# Altium PCB PCB1.PcbDoc (part 2 of 4)
Units mm, origin at the board's own origin, x right, y up, seen from the top; angles counter-clockwise.
Board outline 55.25 x 50.25 mm, 10 copper layers (Top Layer, GND L2, Layer 3, GND L4, PWR L5, PWR L6, GND L7, Layer 8, GND L9, Bottom Layer), stack 1.615 mm thick; 238 components, 362 nets, 1809 pads, 129 vias.
Unrouted connection lines stored in the file: 1070.
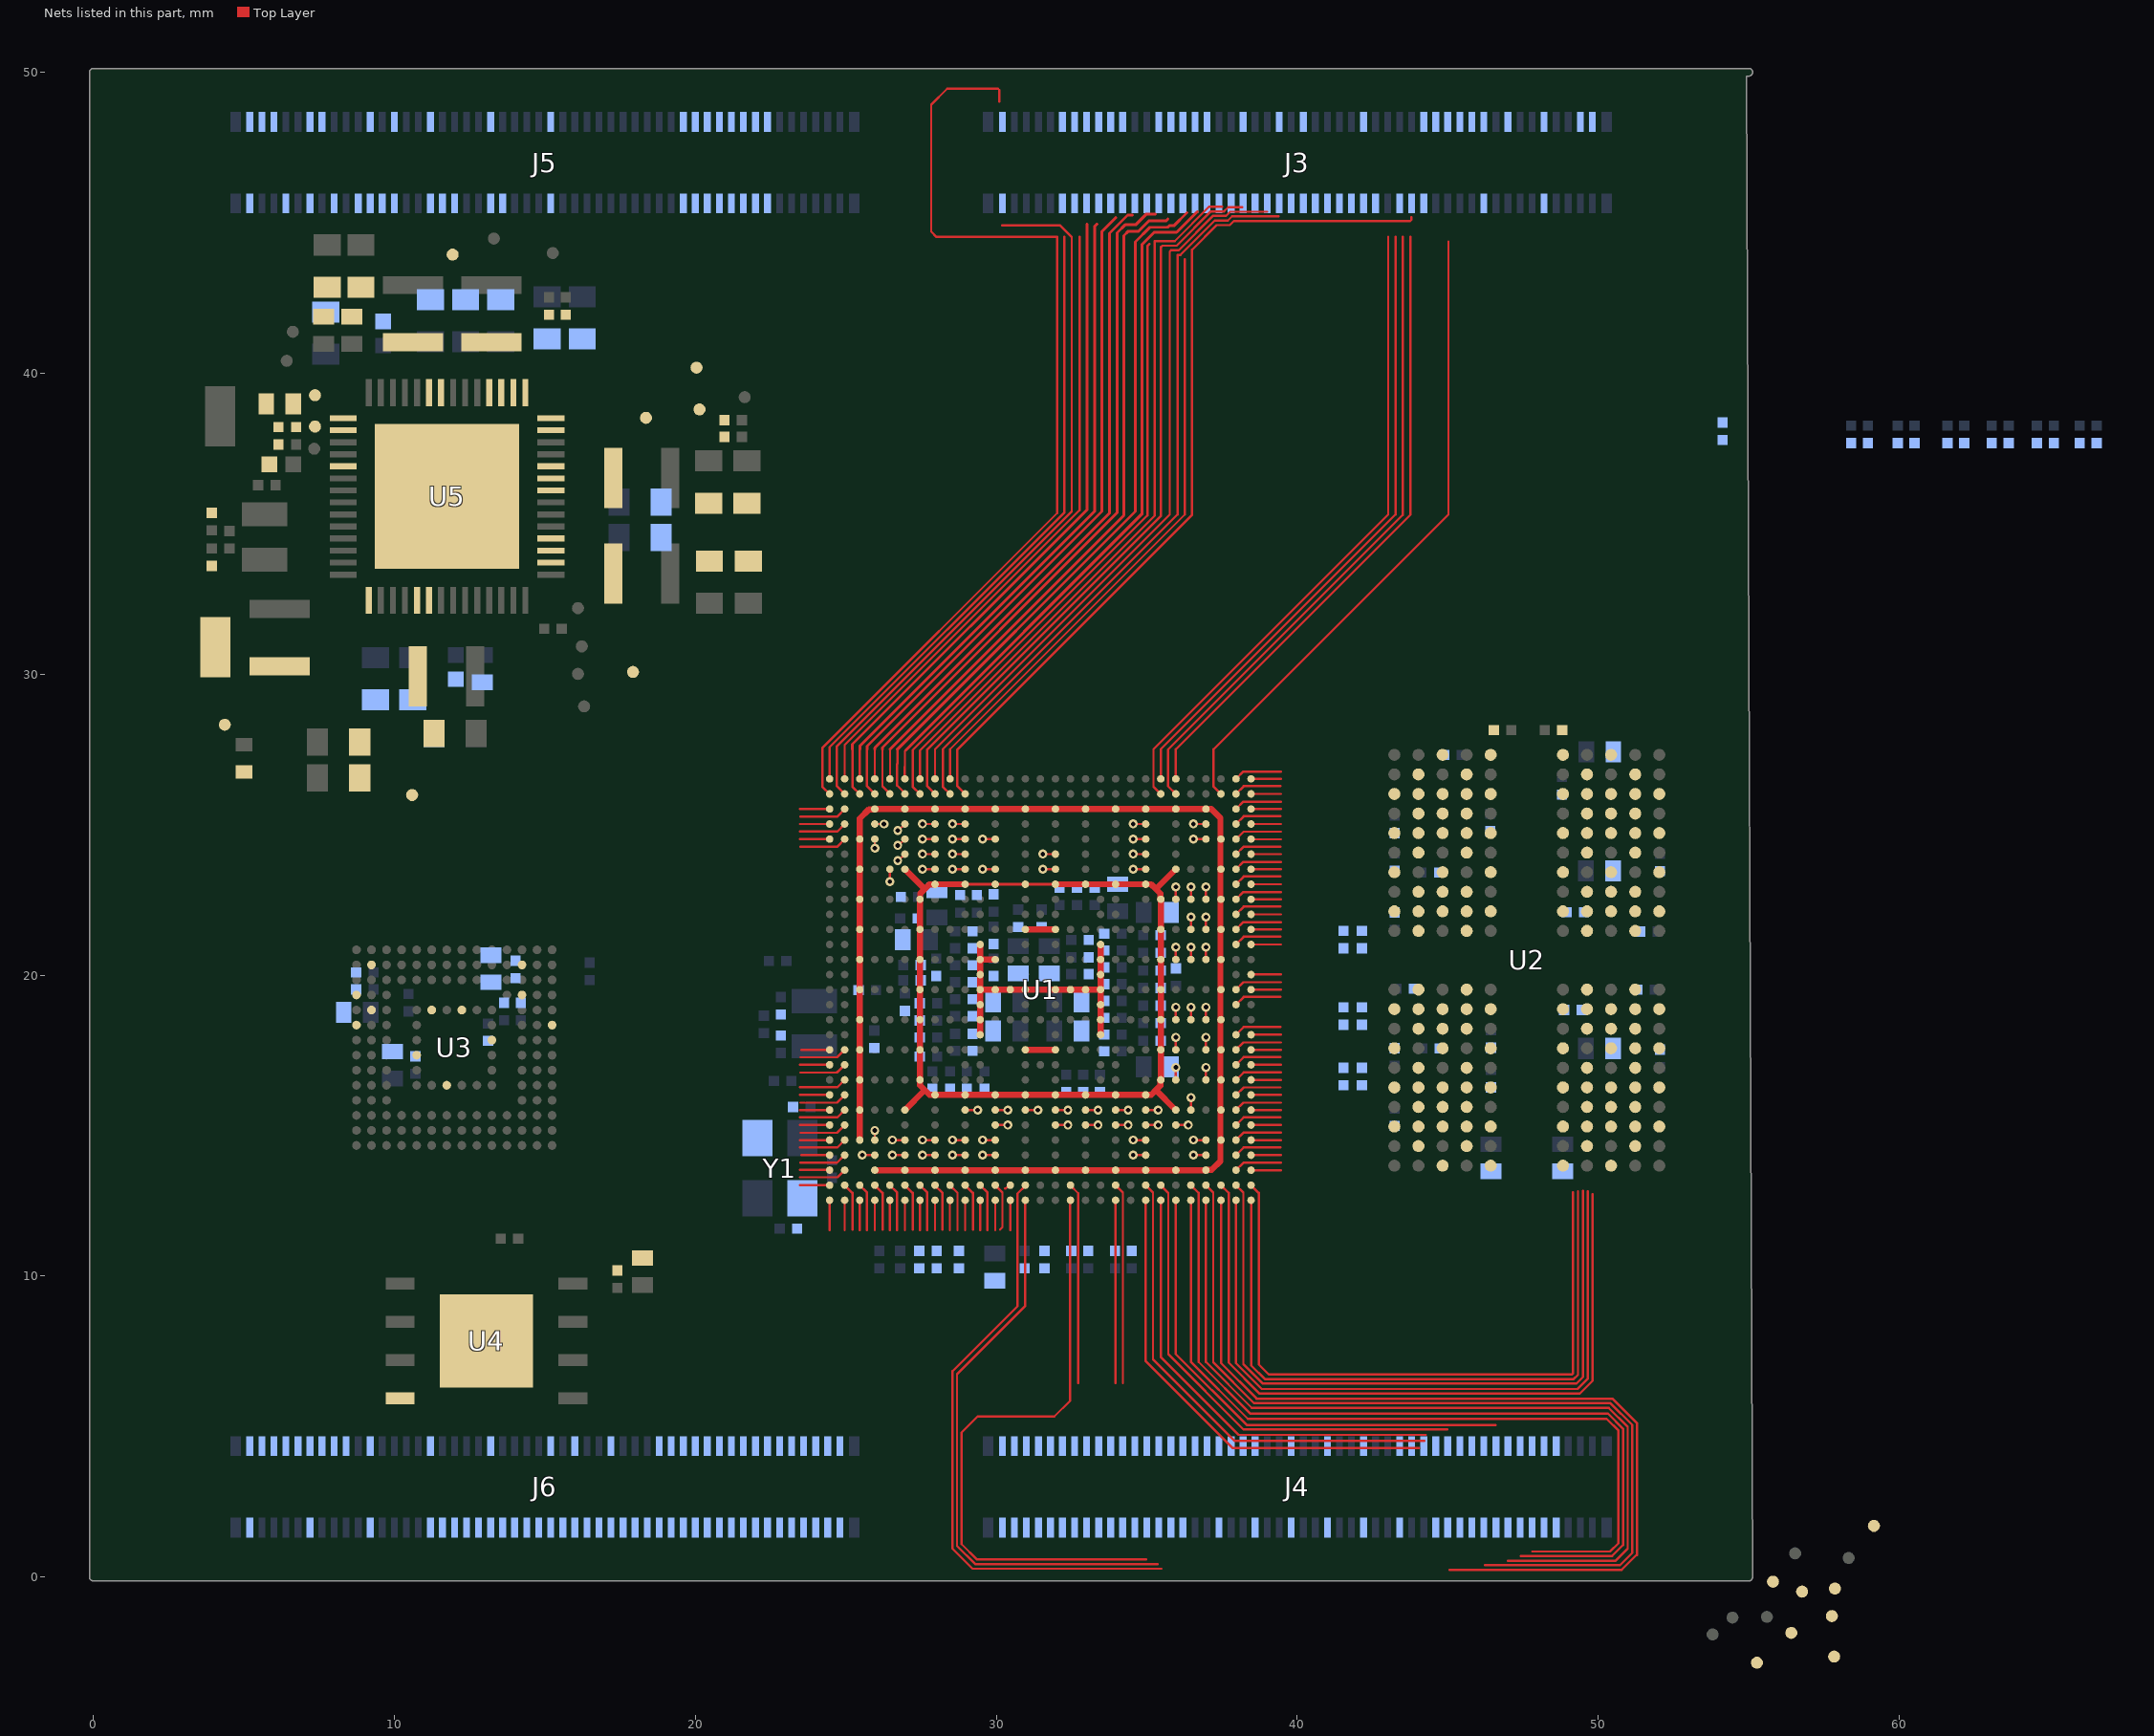
[diagram p2: the nets of this part, all layers, seen from the top]

## Part data
C1 C2 C3 C4 C130 C131: library part CMP-001-000420-11, "CAP_RF_MATCHING", Manufacturer=Murata, Manufacturer Part Number=GRM0335C1H120GA01, Operating temperature range="-55 ... +125C", Package=0201, Temperature characteristics=C0G, Tolerance="+/- 2%", Voltage=50V, ClassName=SMALL, Component Type=Capacitor, ComponentLink1Description=1_Datasheet, ComponentLink2Description="2_Product page", ComponentLink3Description=3_X-information, ComponentLink4Description=4_X-information, Creation date=20211123, HasBeenBuilt=TBD, Part Number=GRM0335C1H120GA01, Remark="RF matching, use part number", Sort order=202, Source=RLC_UN1Q.SchLib, System=RLC
C5 C6 C7 C11 C12 C13 C14 C17 C18 C19 C20 C21 C23 C24 C25 C27 C28 C29 C31 C32 C33 C34 C36 C37 C38 C39 C40 C41 C42 C44 C45 C46 C47 C48 C49 C50 C52 C53 C54 C56 C57 C58 C59 C63 C64 C65 C66 C69 C70 C71 C72 C73 C74 C76 C77 C78 C79 C80 C81 C82 C103 C106 C133 C134 C135 C136 C137 C138 C139 C140 C141 C142: library part CMP-001-000336-15, "CAP", Manufacturer="KYOCERA AVX", Manufacturer Part Number=KGM03CS61A105MH, Operating temperature range="-55C to +105C", Package=0201, Temperature characteristics=X6S, Tolerance=+/-20%, Voltage=10V, Alternative component=Allowed, ClassName=SMALL, Component Type=Capacitor, ComponentLink1Description=1_Datasheet, ComponentLink2Description="2_Product page", ComponentLink3Description=3_X-information, ComponentLink4Description=4_X-information, Creation date=20190101, HasBeenBuilt=False, Part Number=KGM03CS61A105MH, Sort order=302, Source=RLC_UN1Q.SchLib, System=RLC
C8 C10 C16 C22 C26 C30 C35 C43 C51 C55 C61 C62 C67 C68 C75 C91 C97 C99 C110 C132: library part CMP-001-000883-14, "CAP", Manufacturer="Cal-Chip Electronics", Manufacturer Part Number=GMC04X6S106M6R3NT, Package=0402, Temperature characteristics=X6S, Tolerance=+/-20%, Voltage=6.3V, Alternative component=Allowed, Component Type=Capacitor, ComponentLink1Description=1_Datasheet, ComponentLink2Description="2_Product page", ComponentLink3Description=3_X-information, ComponentLink4Description=4_X-information, Creation date=26042024, HasBeenBuilt=TBD, Part Number=GMC04X6S106M6R3NT, Sort order=304, System=RLC
C9 C15 C83 C84 C85 C89 C90 C92 C93 C94 C95 C96 C100 C143: library part CMP-001-000889-11, "CAP", Manufacturer=Murata, Manufacturer Part Number=GRM033C81A224KE01D, Package=0201, Temperature characteristics=X6S, Tolerance=+/-20%, Voltage=10V, Alternative component=Allowed, ClassName=SMALL, Component Type=Capacitor, ComponentLink1Description=1_Datasheet, ComponentLink2Description="2_Product page", ComponentLink3Description=3_X-information, ComponentLink4Description=4_X-information, Creation date=26042024, Dimensions WxLxH=0.35, HasBeenBuilt=TBD, Part Number=GRM033C81A224KE01D, Sort order=302, System=RLC
C60 C88 C112 C115 C129: library part CMP-001-000888-12, "CAP", Manufacturer=Murata, Manufacturer Part Number=GRT155C81A475ME13J, Package=0402, Temperature characteristics=X6S, Tolerance=+/-10%, Voltage=10V, Alternative component=Allowed, Component Type=Capacitor, ComponentLink1Description=1_Datasheet, ComponentLink2Description="2_Product page", ComponentLink3Description=3_X-information, ComponentLink4Description=4_X-information, Creation date=26042024, HasBeenBuilt=TBD, Part Number=GRT155C81A475ME13J, Sort order=304, System=RLC
C87: library part CMP-001-000281-14, "CAP", Manufacturer=Murata, Manufacturer Part Number=GRM033R71E222KA12J, Package=0201, Temperature characteristics=X7R, Tolerance=+/-10%, Voltage=25V, Alternative component=Allowed, ClassName=SMALL, Component Type=Capacitor, ComponentLink1Description=1_Datasheet, ComponentLink2Description="2_Product page", ComponentLink3Description=3_X-information, ComponentLink4Description=4_X-information, Creation date=20222504, HasBeenBuilt=TBD, Part Number=GRM033R71E222KA12J, Sort order=302, Source=RLC_UN1Q.SchLib, System=RLC
C98: library part CMP-001-000400-12, "CAP_RF_MATCHING", Manufacturer=Murata, Manufacturer Part Number=GJM0335C1E180JB01, Package=0201, Temperature characteristics=C0G, Tolerance=+/-2%, Voltage=25V, ClassName=SMALL, Component Type=Capacitor, ComponentLink1Description=1_Datasheet, ComponentLink2Description="2_Product page", ComponentLink3Description=3_X-information, ComponentLink4Description=4_X-information, Creation date=20200101, HasBeenBuilt=TBD, Part Number=GJM0335C1E180JB01, Remark="RF matching, use part number", Sort order=202, Source=RLC_UN1Q.SchLib, System=RLC
C101 C105 C109 C114 C118 C119 C122 C126: library part CMP-001-001253-9, "CAP", Manufacturer=Murata, Manufacturer Part Number=GRM188Z71A106KA73D, Package=0603, Temperature characteristics=X7R, Tolerance=+/-10%, Voltage=10V, Alternative component=Allowed, Component Type=Capacitor, ComponentLink1Description=1_Datasheet, ComponentLink2Description="2_Product page", ComponentLink3Description=3_X-information, ComponentLink4Description=4_X-information, Creation date=20240404, Part Number=GRM188Z71A106KA73D, Sort order=306, System=RLC
C102 C107 C111 C116 C120 C123: library part CMP-001-000259-10, "Not Assembled - CAP", Package=0603, Component Type=Capacitor, ComponentLink1Description=1_Datasheet, ComponentLink2Description="2_Product page", ComponentLink3Description=3_X-information, ComponentLink4Description=4_X-information, Creation date=20190101, HasBeenBuilt=TBD, Sort order=999, Source=RLC_UN1Q.SchLib, System=RLC
C104 C108 C113 C117 C121 C124: library part CMP-001-000890-13, "CAP", Manufacturer=Murata, Manufacturer Part Number=GRM188C80J226ME15D, Package=0603, Temperature characteristics=X6S, Tolerance=+/-20%, Voltage=6.3V, Alternative component=Allowed, Component Type=Capacitor, ComponentLink1Description=1_Datasheet, ComponentLink2Description="2_Product page", ComponentLink3Description=3_X-information, ComponentLink4Description=4_X-information, Creation date=26042024, HasBeenBuilt=TBD, Part Number=GRM188C80J226ME15D, Sort order=306, System=RLC
C125 C127 C128: library part CMP-001-001247-9, "CAP", Manufacturer=Murata, Manufacturer Part Number=GRM155Z71A105KE01J, Package=0402, Temperature characteristics=X7R, Tolerance=+/-10%, Voltage=10V, Alternative component=Allowed, Component Type=Capacitor, ComponentLink1Description=1_Datasheet, ComponentLink2Description="2_Product page", ComponentLink3Description=3_X-information, ComponentLink4Description=4_X-information, Creation date=20240404, Part Number=GRM155Z71A105KE01J, Sort order=304, System=RLC
J1 J2: library part CMP-001-000157-12, Part Number="TP 1x2mm", ClassName=SMALL, Component Type="Test Point", ComponentLink1Description=1_Datasheet, ComponentLink2Description="2_Product page", ComponentLink3Description=3_X-information, ComponentLink4Description=4_X-information, Creation date=20200101, Design Item ID=TP_1x2mm, HasBeenBuilt=-, Sort order=-, Source=Conn_UN1Q.SchLib, System="Test Point"
J3 J4 J5 J6: "100 Position Connector Plug, Outer Shroud Contacts Surface Mount Gold", Package=None, Check_prices=https://www.snapeda.com/parts/DF40C-100DP-0.4V(51)/Hirose/view-part/?ref=eda, MF="Hirose Electric", MP=DF40C-100DP-0.4V(51), SnapEDA_Link=https://www.snapeda.com/parts/DF40C-100DP-0.4V(51)/Hirose/view-part/?ref=snap
L1: library part CMP-001-000738-12, "FERRITE", Current=3.1A, Manufacturer=Murata, Manufacturer Part Number=BLM15KD300SN1D, Operating temperature range="-55 ... +125C", Package=0402, Part Number=BLM15KD300SN1, Component Type=Ferrite, ComponentLink1Description=1_Datasheet, ComponentLink1URL=https://www.murata.com/en-us/products/productdetail.aspx?cate=luNoiseSupprFilteChipFerriBead&partno=BLM15KD300SN1%23, ComponentLink2Description="2_Product page", ComponentLink3Description=3_X-information, ComponentLink4Description=4_X-information, Creation date=20200304, Dimensions WxLxH=0.55mm, ECCN=EAR99, HasBeenBuilt=Saluki2, RoHS=RoHS3, Sort order=364, Source=Discrete_UN1Q.SchLib, System=Discrete
L2 L3 L4 L5 L6 L7: library part CMP-001-000947-11, "IND, Low DCR shielded", Manufacturer=TDK, Manufacturer Part Number=VLS252012HBX-R47M-1, Operating temperature range="-40 ... +105 °C", Package=2520, ClassName=BIG, Component Type=Inductor, ComponentLink1Description=1_Datasheet, ComponentLink1URL=https://product.tdk.com/en/system/files?file=dam/doc/product/inductor/inductor/smd/catalog/inductor_commercial_power_vls252012hbx-1_en.pdf, ComponentLink2Description="2_Product page", ComponentLink3Description=3_X-information, ComponentLink4Description=4_X-information, Creation date=09022024, Dimensions WxLxH="2.5 x 2.0 x 1.2mm", Part Number=VLS252012HBX-R47M-1, Sort order=348, Source=UUDET_KOMPONENTIT.SchLib, System=RLC
PTP1 PTP2 PTP3 PTP4 PTP5 PTP6 PTP7 PTP8 PTP9 PTP10 PTP11 PTP14 PTP15 PTP16 PTP17 PTP18 PTP19 PTP20 PTP21 PTP22 PTP23 PTP24 PTP25 PTP26 PTP27 PTP28 PTP29 PTP30 PTP31 PTP32 PTP33 PTP34: library part CMP-001-001296-3, "Production Testpoint 0.4mm. Flying probe. Use 1mm pitch.", Part Number="PTP 0.4mm", ClassName=SMALL, Component Type="Test Point", ComponentLink1Description=1_Datasheet, ComponentLink2Description="2_Product page", ComponentLink3Description=3_X-information, ComponentLink4Description=4_X-information, Creation date=20240909, Design Item ID=PTP_0.4mm, HasBeenBuilt=-, Sort order=-, System="Test Point"
QZ1 QZ2: library part CMP-001-000697-8, "SMT Quartz Crystal", Manufacturer="Micro Crystal", Manufacturer Part Number=CM8V-T1A-32.768KHZ-9PF-20PPM-TA-QC, Operating temperature range="-40 .... +85 °C", Package=2-SMD, ClassName=BIG, Component Type="Crystal & Oscillator", ComponentLink1Description=1_Datasheet, ComponentLink1URL=https://www.microcrystal.com/fileadmin/Media/Products/32kHz/Datasheet/CM8V-T1A.pdf, ComponentLink2Description="2_Product page", ComponentLink2URL=https://www.microcrystal.com/en/products/khz-quartz-crystals/cm8v-t1a/, ComponentLink3Description=3_X-information, ComponentLink4Description=4_X-information, Creation date=20210913, Dimensions WxLxH=1.2x2.0x0.6mm, HasBeenBuilt=SleeveIO_01, Part Number=CM8V-T1A-32.768KHZ-9PF-20PPM-TA-QC, Sort order=455, Source=Discrete_UN1Q.SchLib, System=Discrete
R1 R5 R8 R9 R10 R11 R16 R17 R22 R23 R24 R26 R28 R32: library part CMP-001-000434-10, "Not Assembled - RES", Package=0201, ClassName=SMALL, Component Type=Resistor, ComponentLink1Description=1_Datasheet, ComponentLink2Description="2_Product page", ComponentLink3Description=3_X-information, ComponentLink4Description=4_X-information, Creation date=20190101, HasBeenBuilt=TBD, Sort order=999, Source=RLC_UN1Q.SchLib, System=RLC
R2 R3 R30 R31: library part CMP-001-000526-11, "RES", Manufacturer=YAGEO, Package=0201, Part Number=RC0201FR-07100KL, Power Rating=1/20W, Tolerance=1%, Alternative component=Allowed, ClassName=SMALL, Component Type=Resistor, ComponentLink1Description=1_Datasheet, ComponentLink2Description="2_Product page", ComponentLink3Description=3_X-information, ComponentLink4Description=4_X-information, Creation date=20190101, HasBeenBuilt=TBD, Sort order=322, Source=RLC_UN1Q.SchLib, System=RLC
R4 R12: library part CMP-001-000446-13, "RES", Manufacturer=YAGEO, Package=0201, Part Number=RC0201FR-0710KL, Power Rating=1/20W, Tolerance=1%, Alternative component=Allowed, ClassName=SMALL, Component Type=Resistor, ComponentLink1Description=1_Datasheet, ComponentLink2Description="2_Product page", ComponentLink3Description=3_X-information, ComponentLink4Description=4_X-information, Creation date=20190101, HasBeenBuilt=TBD, Sort order=322, Source=RLC_UN1Q.SchLib, System=RLC
R6: library part CMP-001-001254-9, "RES", Manufacturer="MULTICOMP PRO", Package=0201, Part Number=MCRE000254, Power Rating=1/20W, Tolerance=1%, Alternative component=Allowed, ClassName=SMALL, Component Type=Resistor, ComponentLink1Description=1_Datasheet, ComponentLink2Description="2_Product page", ComponentLink3Description=3_X-information, ComponentLink4Description=4_X-information, Creation date=20240404, Sort order=322, System=RLC
R7: library part CMP-001-000576-12, "RES", Manufacturer="Panasonic Electronic Components", Package=0201, Part Number=ERJ-1GNF5103C, Power Rating=1/20W, Tolerance=1%, Alternative component=Allowed, ClassName=SMALL, Component Type=Resistor, ComponentLink1Description=1_Datasheet, ComponentLink2Description="2_Product page", ComponentLink3Description=3_X-information, ComponentLink4Description=4_X-information, Creation date=20211123, HasBeenBuilt=TBD, Sort order=322, Source=RLC_UN1Q.SchLib, System=RLC
R13 R14 R15: library part CMP-001-000554-13, "RES", Manufacturer="Panasonic Electronic Components", Package=0201, Part Number=ERJ-1GEJ241C, Power Rating=1/20W, Tolerance=1%, Alternative component=Allowed, ClassName=SMALL, Component Type=Resistor, ComponentLink1Description=1_Datasheet, ComponentLink2Description="2_Product page", ComponentLink3Description=3_X-information, ComponentLink4Description=4_X-information, Creation date=20190101, HasBeenBuilt=TBD, Sort order=322, Source=RLC_UN1Q.SchLib, System=RLC
R18: library part CMP-001-000549-13, "RES", Manufacturer="Vishay Dale", Package=0201, Part Number=CRCW0201200RFNED, Power Rating=1/20W, Tolerance=1%, Alternative component=Allowed, ClassName=SMALL, ComponentLink1Description=1_Datasheet, ComponentLink2Description="2_Product page", ComponentLink3Description=3_X-information, ComponentLink4Description=4_X-information, Creation date=20190101, HasBeenBuilt=TBD, Sort order=322, Source=RLC_UN1Q.SchLib, System=RLC
R19: library part CMP-001-001255-9, "RES", Manufacturer=Panasonic, Manufacturer Part Number=ERJ1GNF8201C, Package=0201, Power Rating=1/20W, Tolerance=1%, Alternative component=Allowed, ClassName=SMALL, Component Type=Resistor, ComponentLink1Description=1_Datasheet, ComponentLink2Description="2_Product page", ComponentLink3Description=3_X-information, ComponentLink4Description=4_X-information, Creation date=20240404, Part Number=ERJ1GNF8201C, Sort order=322, System=RLC
R21: library part CMP-001-001255-9, "RES", Manufacturer="Panasonic Electronic Components", Package=0201, Part Number=ERJ1GNF8201C, Power Rating=1/20W, Tolerance=1%, Alternative component=Allowed, ClassName=SMALL, Component Type=Resistor, ComponentLink1Description=1_Datasheet, ComponentLink2Description="2_Product page", ComponentLink3Description=3_X-information, ComponentLink4Description=4_X-information, Creation date=20240404, Sort order=322, System=RLC
R25: library part RES_0201_10k, "RES", Package=0201, Power Rating=1/20W, Tolerance=+/-1%, ClassName=SMALL, ComponentLink1Description=1_Datasheet, ComponentLink2Description=2_Product_page, ComponentLink3Description=3_X-information, ComponentLink4Description=4_X-information, Creation date=20190101, Desc2=resistance_10K_1%_1/20W, HasBeenBuilt=TBD, HasBeenChecked=None, Sort order=322, System=RLC
R27 R29: library part CMP-001-000429-13, "RES", Manufacturer=YAGEO, Package=0201, Part Number=RC0201JR-070RL, Power Rating=1/20W, Tolerance=5%, Alternative component=Allowed, ClassName=SMALL, Component Type=Resistor, ComponentLink1Description=1_Datasheet, ComponentLink2Description="2_Product page", ComponentLink3Description=3_X-information, ComponentLink4Description=4_X-information, Creation date=20190101, HasBeenBuilt=TBD, Sort order=322, Source=RLC_UN1Q.SchLib, System=RLC
R33 R34 R35 R36 R37 R38 R39 R40 R41 R42 R43 R44: library part CMP-001-000475-13, "RES", Manufacturer="Yageo Group", Manufacturer Part Number=RC0201FR-074K7L, Package=0201, Power Rating=1/20W, Tolerance=1%, Alternative component=Allowed, ClassName=SMALL, Component Type=Resistor, ComponentLink1Description=1_Datasheet, ComponentLink2Description="2_Product page", ComponentLink3Description=3_X-information, ComponentLink4Description=4_X-information, Creation date=20190101, HasBeenBuilt=TBD, Part Number=RC0201FR-074K7L, Sort order=322, Source=RLC_UN1Q.SchLib, System=RLC
U1: library part CMP-001-000983-8, "CPU QUAD CORTEX A53+M4 1.6GHZ BGA548 Industrial", Manufacturer="NXP Semiconductors", Operating temperature range="-40... +105 °C", Package=FCBGA548, ClassName=BIG, Component Type=Processor, ComponentLink1Description=1_Datasheet, ComponentLink1URL=https://www.nxp.com/part/MIMX8ML8CVNKZAB#/, ComponentLink2Description="2_Product page", ComponentLink3Description=3_X-information, ComponentLink4Description=4_X-information, Creation date=20240524, Design Item ID=MIMX8ML8CVNKZAB, Dimensions WxLxH="15 x 15 x 1.33mm", Manufacturer Part Number=MIMX8ML8CVNKZAB, Part Number=MIMX8ML8CVNKZAB, Sort order=501, Source=UUDET_KOMPONENTIT.SchLib, System=IC
U2: library part CMP-001-001446-1, "MEM LPDDR4 SDRAM 2133MHz 2Gx32Gb 1.1V", Manufacturer=Micron, Operating temperature range="-40 .... +105 °C", Package=TFBGA-200, ClassName=BIG, Component Type=Memory, ComponentLink1Description=1_Datasheet, ComponentLink1URL=https://www.micron.com/products/memory/dram-components/lpddr4/part-catalog/part-detail/mt53e2g32d4de-046-aat-c#login-modal, ComponentLink2Description="2_Product page", ComponentLink2URL=https://www.micron.com/products/memory/dram-components/lpddr4/part-catalog/part-detail/mt53e2g32d4de-046-aat-c, ComponentLink3Description=3_X-information, ComponentLink4Description=4_X-information, Creation date=20250619, Design Item ID="MT53E2G32D4DE-046 AAT:C", Dimensions WxLxH=10x14.5x1.2mm, ECCN=EAR99, Manufacturer Part Number="MT53E2G32D4DE-046 AAT:C", Part Number="MT53E2G32D4DE-046 AAT:C", Sort order=511, System=IC
U3: library part CMP-001-001175-2, "MEM NAND FLASH 512GB eMMC 5.1 HS400 2.7-3.6V, 1.8V VCCQ, TFBGA153 Ferri-eMMC Automotive", Manufacturer="Silicon Motion", Manufacturer Part Number=SM662PBFBFSS, Operating temperature range="-40 .... +105 °C", Package=TFBGA-153, Component Type=Memory, ComponentLink1Description=1_Datasheet, ComponentLink2Description="2_Product page", ComponentLink2URL=https://www.siliconmotion.com/products/Ferri-eMMC/detail, ComponentLink3Description="3_Product brief", ComponentLink3URL=https://www.siliconmotion.com/download/DWo5/a/Ferri-eMMC_PB_EN.pdf, ComponentLink4Description=4_X-information, Creation date=20250508, Dimensions WxLxH="11.5 x 13 x 1.2 mm", Part Number="SM662PBF BFS", Sort order=511, System=IC
U4: "Description", Manufacturer_Name=Micron, Copyright="Copyright (C) 2025 Ultra Librarian. All rights reserved.", Manufacturer_Part_Number=MT25QU256ABA1EW7-0SIT, RefDes=RefDes, Type=Type
U5: library part CMP-031-000204-7, "POWER MANAGEMENT 2.7-5.5V HVQFN56", Manufacturer="NXP SEMICONDUCTORS", Manufacturer Part Number=PCA9450CHN, Operating temperature range="-40 .... +105 °C", Package=QFN56, ClassName=BIG, Component Type="Power Supply", ComponentLink1Description=1_Datasheet, ComponentLink1URL=https://www.nxp.com/products/power-management/pmics-and-sbcs/pmics/power-management-ic-pmic-for-i-mx-8m-mini-nano-plus:PCA9450, ComponentLink2Description="2_Product page", ComponentLink3Description=3_X-information, ComponentLink4Description=4_X-information, Creation date=20240207, Design Item ID=PCA9450CHN, Dimensions WxLxH=7.0x7.0x1.0, Part Number=PCA9450CHN, Sort order=451, Source=UUDET_KOMPONENTIT.SchLib, System=IC
Y1: library part CMP-001-001243-5, "Crystal 24 MHz ±10ppm 9pF 40Ohms 4-SMD", Manufacturer=Epson, Manufacturer Part Number="TSX-3225 24.0000MF20G-AC3", Operating temperature range="-40 ... +105C", Tolerance=+/-10ppm, Component Type="Crystal & Oscillator", ComponentLink1Description=1_Datasheet, ComponentLink1URL=https://support.epson.biz/td/api/doc_check.php?dl=brief_TSX-3225&lang=en, ComponentLink2Description="2_Product page", ComponentLink3Description=3_X-information, ComponentLink4Description=4_X-information, Creation date=20240430, Dimensions WxLxH="3.2 x 2.5 x 0.6mm", Part Number="TSX-3225 24.0000MF20G-AC3", Sort order=455, System=Discrete

## Via types
v1: diameter 0.3, hole 0.15, Top Layer to Bottom Layer, tented both sides, 129 vias

## Nets (pads, with @x,y where several pads share a name; then routed paths per layer and width w, separated by ;. In a path a pad name is that pad's centre, name@x,y a point inside that pad or via, vN(x,y) a via of type N, cw(c..) or ccw(c..) an arc to the next point about the centre after c; other vN are vias at no path point)
5V0_SMPS: L1.1
\JTAG_RST: J4.66 PTP1.1 R4.1 U1.G20 | length 0.4
  Top Layer w0.076: U1.G20@28.964,15.52 v1@29.377,15.52
  other v1: 29.38,15.518
\mPCIe_RST: J5.81 U1.AF20 | length 0.4
  Top Layer w0.076: v1@28.551,25.02 U1.AF20@28.964,25.02
  other v1: 28.548,25.023
\USB_HUB_RST: J5.96 U1.AE20 | length 0.4
  Top Layer w0.076: v1@28.551,24.52 U1.AE20@28.964,24.52
  other v1: 28.548,24.523
BOOT_MODE0: J4.9 U1.G10 | length 0.4
  Top Layer w0.076: U1.G10@33.964,15.52 v1@34.377,15.52
  other v1: 34.38,15.518
BOOT_MODE1: J4.20 U1.F8 | length 0.4
  Top Layer w0.076: U1.F8@34.964,15.02 v1@35.377,15.02
  other v1: 35.38,15.018
BOOT_MODE2: J4.12 U1.G8 | length 0.4
  Top Layer w0.076: U1.G8@34.964,15.52 v1@35.377,15.52
  other v1: 35.38,15.518
BOOT_MODE3: J4.16 U1.G12 | length 0.4
  Top Layer w0.076: U1.G12@32.964,15.52 v1@33.377,15.52
  other v1: 33.38,15.518
CLKIN1: J6.86 U1.K28 | length 1.9
  Top Layer w0.076: 23.489,16.763 24.707,16.763 U1.K28@24.964,17.02 ; 24.721,16.785 U1.K28@24.964,17.028
CLKIN2: J6.94 U1.L28 | length 1.6
  Top Layer w0.076: 23.489,17.271 24.707,17.271 U1.L28@24.964,17.528
CLKOUT1: J6.90 U1.K29 | length 1
  Top Layer w0.076: 23.478,17.028 U1.K29@24.464,17.028
CLKOUT2: J6.98 U1.L29 | length 0.9
  Top Layer w0.076: 23.528,17.522 23.53,17.52 U1.L29@24.464,17.52
CSI1_CKN: J4.84 U1.E22 | length 0.4
  Top Layer w0.076: v1@27.551,14.52 U1.E22@27.964,14.52
  other v1: 27.548,14.523
CSI1_CKP: J4.86 U1.D22 | length 0.4
  Top Layer w0.076: v1@27.551,14.02 U1.D22@27.964,14.02
  other v1: 27.548,14.023
CSI1_DN0: J4.72 U1.E18 | length 0.4
  Top Layer w0.076: v1@29.551,14.52 U1.E18@29.964,14.52
  other v1: 29.548,14.523
CSI1_DN1: J4.78 U1.E20 | length 0.4
  Top Layer w0.076: v1@28.551,14.52 U1.E20@28.964,14.52
  other v1: 28.548,14.523
CSI1_DN2: J4.90 U1.E24 | length 0.4
  Top Layer w0.076: v1@26.551,14.52 U1.E24@26.964,14.52
  other v1: 26.548,14.523
CSI1_DN3: J4.96 U1.E26 | length 0.3
  Top Layer w0.076: U1.E26@25.964,14.52 v1(25.964,14.839)
CSI1_DP0: J4.74 U1.D18 | length 0.4
  Top Layer w0.076: v1@29.551,14.02 U1.D18@29.964,14.02
  other v1: 29.548,14.023
CSI1_DP1: J4.80 U1.D20 | length 0.4
  Top Layer w0.076: v1@28.551,14.02 U1.D20@28.964,14.02
  other v1: 28.548,14.023
CSI1_DP2: J4.92 U1.D24 | length 0.4
  Top Layer w0.076: v1@26.551,14.02 U1.D24@26.964,14.02
  other v1: 26.548,14.023
CSI1_DP3: J4.98 U1.D26 | length 0.4
  Top Layer w0.076: v1@25.551,14.02 U1.D26@25.964,14.02
  other v1: 25.548,14.023
CSI2_CKN: J6.16 U1.B23 | length 1.6
  Top Layer w0.076: U1.B23@27.464,13.02 27.707,12.777 27.707,11.534
CSI2_CKP: J6.18 U1.A23 | length 1
  Top Layer w0.076: 27.464,11.534 U1.A23@27.464,12.52
CSI2_DN0: J6.28 U1.B25 | length 1.6
  Top Layer w0.076: U1.B25@26.464,13.02 26.707,12.777 26.707,11.534
CSI2_DN1: J6.22 U1.B24 | length 1.6
  Top Layer w0.076: U1.B24@26.964,13.02 27.221,12.763 27.221,11.545
CSI2_DN2: J6.10 U1.B22 | length 1.6
  Top Layer w0.076: U1.B22@27.956,13.02 28.213,12.763 28.213,11.545
CSI2_DN3: J6.4 U1.B21 | length 1.6
  Top Layer w0.076: U1.B21@28.456,13.02 28.71,12.766 28.71,11.536
CSI2_DP0: J6.30 U1.A25 | length 1
  Top Layer w0.076: 26.464,11.534 U1.A25@26.464,12.52
CSI2_DP1: J6.24 U1.A24 | length 1
  Top Layer w0.076: 26.964,11.534 U1.A24@26.964,12.52
CSI2_DP2: J6.12 U1.A22 | length 1
  Top Layer w0.076: 27.964,11.533 U1.A22@27.964,12.52
CSI2_DP3: J6.6 U1.A21 | length 1
  Top Layer w0.076: 28.456,11.534 U1.A21@28.456,12.52
DRAM_CA0_A: U1.L6 U2.R2 | length 0.4
  Top Layer w0.076: U1.L6@35.964,17.52 v1@35.964,17.933
  other v1: 35.967,17.936
DRAM_CA0_B: U1.W4 U2.H2 | length 0.4
  Top Layer w0.076: U1.W4@36.964,21.52 v1@36.964,21.933
  other v1: 36.967,21.936
DRAM_CA1_A: U1.L4 U2.P2 | length 0.4
  Top Layer w0.076: U1.L4@36.964,17.52 v1@36.964,17.933
  other v1: 36.967,17.936
DRAM_CA1_B: U1.W5 U2.J2 | length 0.4
  Top Layer w0.076: U1.W5@36.464,21.52 v1@36.464,21.933
  other v1: 36.467,21.936
DRAM_CA2_A: U1.E4 U2.R9 | length 0.4
  Top Layer w0.076: v1@36.551,14.52 U1.E4@36.964,14.52
  other v1: 36.548,14.523
DRAM_CA2_B: U1.AE4 U2.H9 | length 0.4
  Top Layer w0.076: v1@36.551,24.52 U1.AE4@36.964,24.52
  other v1: 36.548,24.523
DRAM_CA3_A: U1.D4 U2.R10 | length 0.4
  Top Layer w0.076: v1@36.551,14.02 U1.D4@36.964,14.02
  other v1: 36.548,14.023
DRAM_CA3_B: U1.AF4 U2.H10 | length 0.4
  Top Layer w0.076: v1@36.551,25.02 U1.AF4@36.964,25.02
  other v1: 36.548,25.023
DRAM_CA4_A: U1.N4 U2.R11 | length 0.4
  Top Layer w0.076: U1.N4@36.964,18.52 v1@36.964,18.933
  other v1: 36.967,18.936
DRAM_CA4_B: U1.U5 U2.H11 | length 0.4
  Top Layer w0.076: U1.U5@36.464,20.52 v1@36.464,20.933
  other v1: 36.467,20.936
DRAM_CA5_A: U1.N5 U2.P11 | length 0.4
  Top Layer w0.076: U1.N5@36.464,18.52 v1@36.464,18.933
  other v1: 36.467,18.936
DRAM_CA5_B: U1.U6 U2.J11 | length 0.4
  Top Layer w0.076: U1.U6@35.964,20.52 v1@35.964,20.933
  other v1: 35.967,20.936
DRAM_CK_A_N: R16.1 U1.M2 U2.P9 | length 1.6
  Top Layer w0.076: U1.M2@37.964,18.02 38.221,18.278 39.439,18.278
DRAM_CK_A_P: R16.2 U1.M1 U2.P8 | length 1
  Top Layer w0.076: U1.M1@38.464,18.02 39.45,18.02
DRAM_CK_B_N: R17.1 U1.V1 U2.J9 | length 1
  Top Layer w0.076: U1.V1@38.464,21.02 39.45,21.02
DRAM_CK_B_P: R17.2 U1.V2 U2.J8 | length 1.6
  Top Layer w0.076: U1.V2@37.964,21.02 38.221,21.278 39.439,21.278
DRAM_CKE0_A: R10.2 U1.J6 U2.P4 | length 0.4
  Top Layer w0.076: U1.J6@35.964,16.52 v1@35.964,16.933
  other v1: 35.967,16.936
DRAM_CKE0_B: R8.2 U1.AA4 U2.J4 | length 0.4
  Top Layer w0.076: U1.AA4@36.964,22.52 v1@36.964,22.933
  other v1: 36.967,22.936
DRAM_CKE1_A: R11.2 U1.G5 U2.P5 | length 0.4
  Top Layer w0.076: U1.G5@36.464,15.52 v1@36.464,15.933
  other v1: 36.467,15.936
DRAM_CKE1_B: R9.2 U1.AA5 U2.J5 | length 0.4
  Top Layer w0.076: U1.AA5@36.464,22.52 v1@36.464,22.933
  other v1: 36.467,22.936
DRAM_DATA0_A: U1.B3 U2.AA11 | length 24.9
  Top Layer w0.076: U1.B3@37.464,13.02 37.721,12.763 37.721,7.124 38.749,6.096 49.381,6.096 49.807,6.521 49.807,12.723
DRAM_DATA0_B: U1.AC1 U2.B2 | length 1
  Top Layer w0.076: U1.AC1@38.464,23.52 39.45,23.52
DRAM_DATA1_A: U1.A2 U2.Y11 | length 23.8
  Top Layer w0.076: U1.A2@37.964,12.52 37.964,7.106 38.822,6.248 49.309,6.248 49.654,6.594 49.654,12.824
DRAM_DATA1_B: U1.AB1 U2.C2 | length 1
  Top Layer w0.076: U1.AB1@38.464,23.02 39.45,23.02
DRAM_DATA2_A: U1.E1 U2.V9 | length 1
  Top Layer w0.076: U1.E1@38.464,14.52 39.45,14.52
DRAM_DATA2_B: U1.W2 U2.F2 | length 1.6
  Top Layer w0.076: U1.W2@37.964,21.52 38.207,21.764 39.45,21.764
DRAM_DATA3_A: U1.F2 U2.U11 | length 1.6
  Top Layer w0.076: U1.F2@37.964,15.02 38.221,15.278 39.439,15.278
DRAM_DATA3_B: U1.Y2 U2.E2 | length 1.6
  Top Layer w0.076: U1.Y2@37.964,22.02 38.221,22.278 39.439,22.278
DRAM_DATA4_A: U1.E2 U2.U9 | length 1.6
  Top Layer w0.076: U1.E2@37.964,14.52 38.207,14.764 39.45,14.764
DRAM_DATA4_B: U1.Y1 U2.E4 | length 1
  Top Layer w0.076: U1.Y1@38.464,22.02 39.45,22.02
DRAM_DATA5_A: U1.C1 U2.V11 | length 1
  Top Layer w0.076: U1.C1@38.464,13.52 39.45,13.52
DRAM_DATA5_B: U1.W1 U2.F4 | length 1
  Top Layer w0.076: U1.W1@38.464,21.52 39.45,21.52
DRAM_DATA6_A: U1.C2 U2.Y9 | length 1.6
  Top Layer w0.076: U1.C2@37.964,13.52 38.207,13.764 39.45,13.764
DRAM_DATA6_B: U1.AC2 U2.C4 | length 1.6
  Top Layer w0.076: U1.AC2@37.964,23.52 38.207,23.764 39.45,23.764
DRAM_DATA7_A: U1.B1 U2.AA9 | length 22.7
  Top Layer w0.076: U1.B1@38.464,13.02 38.721,12.763 38.721,7.067 39.057,6.731 49.119,6.731 49.164,6.776 49.164,12.79
DRAM_DATA7_B: U1.AD1 U2.B4 | length 1
  Top Layer w0.076: U1.AD1@38.464,24.02 39.452,24.02
DRAM_DATA8_A: U1.G1 U2.AA2 | length 1
  Top Layer w0.076: U1.G1@38.464,15.52 39.45,15.52
DRAM_DATA8_B: U1.AH3 U2.B11 | length 21.7
  Top Layer w0.076: U1.AH3@37.464,26.02 37.221,26.264 37.221,27.507 45.02,35.306 45.02,44.374
DRAM_DATA9_A: U1.H1 U2.Y2 | length 1
  Top Layer w0.076: U1.H1@38.464,16.02 39.452,16.02
DRAM_DATA9_B: U1.AJ2 U2.C11 | length 1.6
  Top Layer w0.076: U1.AJ2@37.964,26.52 38.207,26.764 39.45,26.764
DRAM_DATA10_A: U1.K1 U2.V4 | length 1
  Top Layer w0.076: U1.K1@38.464,17.02 39.45,17.02
DRAM_DATA10_B: U1.AE1 U2.E11 | length 1
  Top Layer w0.076: U1.AE1@38.464,24.512 39.45,24.512
DRAM_DATA11_A: U1.K2 U2.V2 | length 1.6
  Top Layer w0.076: U1.K2@37.964,17.02 38.221,17.278 39.439,17.278
DRAM_DATA11_B: U1.AD2 U2.F11 | length 1.6
  Top Layer w0.076: U1.AD2@37.964,24.012 38.221,24.27 39.439,24.27
DRAM_DATA12_A: U1.L2 U2.U2 | length 1.6
  Top Layer w0.076: U1.L2@37.964,17.52 38.207,17.764 39.45,17.764
DRAM_DATA12_B: U1.AE2 U2.F9 | length 1.6
  Top Layer w0.076: U1.AE2@37.964,24.512 38.218,24.766 39.449,24.766
DRAM_DATA13_A: U1.L1 U2.U4 | length 1
  Top Layer w0.076: U1.L1@38.464,17.52 39.45,17.52
DRAM_DATA13_B: U1.AG1 U2.E9 | length 1
  Top Layer w0.076: U1.AG1@38.464,25.52 39.45,25.52
DRAM_DATA14_A: U1.G2 U2.Y4 | length 1.6
  Top Layer w0.076: U1.G2@37.964,15.52 38.207,15.764 39.45,15.764
DRAM_DATA14_B: U1.AG2 U2.C9 | length 1.6
  Top Layer w0.076: U1.AG2@37.964,25.52 38.207,25.764 39.45,25.764
DRAM_DATA15_A: U1.F1 U2.AA4 | length 1
  Top Layer w0.076: U1.F1@38.464,15.02 39.45,15.02
DRAM_DATA15_B: U1.AH1 U2.B9 | length 1
  Top Layer w0.076: U1.AH1@38.464,26.02 39.45,26.02
DRAM_DMI0_A: U1.B2 U2.Y10 | length 23.9
  Top Layer w0.076: U1.B2@37.964,13.02 38.207,12.777 38.207,7.078 38.859,6.426 49.267,6.426 49.497,6.656 49.497,12.838
DRAM_DMI0_B: U1.AB2 U2.C3 | length 1.6
  Top Layer w0.076: U1.AB2@37.964,23.02 38.221,23.278 39.439,23.278
DRAM_DMI1_A: U1.H2 U2.Y3 | length 1.6
  Top Layer w0.076: U1.H2@37.964,16.012 38.221,16.27 39.439,16.27
DRAM_DMI1_B: U1.AH2 U2.C10 | length 1.6
  Top Layer w0.076: U1.AH2@37.964,26.02 38.221,26.278 39.439,26.278
DRAM_nCS0_A: U1.N6 U2.R4 | length 0.4
  Top Layer w0.076: U1.N6@35.964,18.52 v1@35.964,18.933
  other v1: 35.967,18.936
DRAM_nCS0_B: U1.U4 U2.H4 | length 0.4
  Top Layer w0.076: U1.U4@36.964,20.52 v1@36.964,20.933
  other v1: 36.967,20.936
DRAM_nCS1_A: U1.J4 U2.R3 | length 0.4
  Top Layer w0.076: U1.J4@36.964,16.52 v1@36.964,16.933
  other v1: 36.967,16.936
DRAM_nCS1_B: U1.AA6 U2.H3 | length 0.4
  Top Layer w0.076: U1.AA6@35.964,22.52 v1@35.964,22.933
  other v1: 35.967,22.936
DRAM_nRESET: PTP6.1 R12.2 U1.T1 U2.T11 | length 1
  Top Layer w0.076: U1.T1@38.464,20.02 39.452,20.02
DRAM_SDQS0_A_N: U1.D1 U2.V10 | length 1
  Top Layer w0.076: U1.D1@38.464,14.02 39.45,14.02
DRAM_SDQS0_A_P: U1.D2 U2.W10 | length 1.6
  Top Layer w0.076: U1.D2@37.964,14.02 38.221,14.278 39.439,14.278
DRAM_SDQS0_B_N: U1.AA1 U2.E3 | length 1
  Top Layer w0.076: U1.AA1@38.464,22.52 39.45,22.52
DRAM_SDQS0_B_P: U1.AA2 U2.D3 | length 1.6
  Top Layer w0.076: U1.AA2@37.964,22.52 38.207,22.764 39.45,22.764
DRAM_SDQS1_A_N: U1.J1 U2.V3 | length 1
  Top Layer w0.076: U1.J1@38.464,16.512 39.45,16.512
DRAM_SDQS1_A_P: U1.J2 U2.W3 | length 1.6
  Top Layer w0.076: U1.J2@37.964,16.512 38.218,16.766 39.449,16.766
DRAM_SDQS1_B_N: U1.AF1 U2.E10 | length 1
  Top Layer w0.076: U1.AF1@38.464,25.02 39.45,25.02
DRAM_SDQS1_B_P: U1.AF2 U2.D10 | length 1.6
  Top Layer w0.076: U1.AF2@37.964,25.02 38.221,25.278 39.439,25.278
DRAM_VREF: PTP7.1 U1.R2 | length 1.6
  Top Layer w0.076: U1.R2@37.964,19.52 38.207,19.764 39.45,19.764
DRAM_ZQ0: PTP8.1 R13.2 U2.A5
DRAM_ZQ1: PTP11.1 R15.2 U2.A8
DSI_CKN: J4.83 U1.B18 | length 1.6
  Top Layer w0.076: U1.B18@29.964,13.02 30.203,12.781 30.203,11.624 30.124,11.545
DSI_CKP: J4.85 U1.A18 | length 1
  Top Layer w0.076: 29.964,11.534 U1.A18@29.964,12.52
DSI_DN0: J4.71 U1.B16 | length 20.3
  Top Layer w0.076: U1.B16@30.964,13.02 30.964,13.004 30.703,12.744 30.703,9.002 28.543,6.842 28.543,0.946 29.21,0.279 35.484,0.279
DSI_DN1: J4.77 U1.B17 | length 0.2
  Top Layer w0.076: 30.286,12.914 30.31,12.914 30.417,13.02 U1.B17@30.464,13.02
DSI_DN2: J4.89 U1.B19 | length 1.6
  Top Layer w0.076: U1.B19@29.464,13.02 29.707,12.777 29.707,11.534
DSI_DN3: J4.95 U1.B20 | length 1.6
  Top Layer w0.076: U1.B20@28.964,13.02 29.221,12.763 29.221,11.545
DSI_DP0: J4.73 U1.A16 | length 19.3
  Top Layer w0.076: U1.A16@30.964,12.52 30.964,9.015 28.696,6.746 28.696,1.035 29.299,0.432 35.366,0.432
DSI_DP1: J4.79 U1.A17 | length 1
  Top Layer w0.076: 30.464,11.534 U1.A17@30.464,12.52
DSI_DP2: J4.91 U1.A19 | length 1
  Top Layer w0.076: 29.464,11.534 U1.A19@29.464,12.52
DSI_DP3: J4.97 U1.A20 | length 1
  Top Layer w0.076: 28.964,11.534 U1.A20@28.964,12.52
EARC_AUX: U1.AH23 | length 21.6
  Top Layer w0.076: U1.AH23@27.464,26.02 27.221,26.264 27.221,27.473 35.02,35.272 35.02,44.225 35.094,44.299
EARC_N_HPD: J3.59 U1.AH22 | length 24.7
  Top Layer w0.076: U1.AH22@27.964,26.02 27.707,26.278 27.707,27.496 35.472,35.261 35.472,44.192 35.516,44.236 35.992,44.236 37.132,45.377 37.567,45.377 37.707,45.517 38.176,45.517
EARC_P_UTIL: J3.61 U1.AJ23 | length 23.8
  Top Layer w0.076: U1.AJ23@27.464,26.52 27.464,27.468 35.263,35.267 35.263,44.389 35.928,44.389 37.069,45.529 37.504,45.529
ECSPI1_MISO: J5.77 U1.AD20 | length 0.4
  Top Layer w0.076: v1@28.551,24.02 U1.AD20@28.964,24.02
  other v1: 28.548,24.023
ECSPI1_MOSI: J5.75 U1.AC20 | length 0.4
  Top Layer w0.076: v1@28.551,23.52 U1.AC20@28.964,23.52
  other v1: 28.548,23.523
ECSPI2_MISO: J3.31 U1.AH20 | length 29.2
  Top Layer w0.076: U1.AH20@28.964,26.02 28.707,26.278 28.707,27.496 36.506,35.294 36.506,44.104 37.322,44.92 37.756,44.92 37.896,45.06 43.745,45.06 43.79,45.104 43.79,45.187
ECSPI2_MOSI: J3.33 U1.AJ21 | length 20.5
  Top Layer w0.076: U1.AJ21@28.464,26.52 28.464,27.507 36.263,35.306 36.263,43.779
ECSPI2_SCLK: J3.53 U1.AH21 | length 25.1
  Top Layer w0.076: U1.AH21@28.464,26.02 28.221,26.264 28.221,27.507 36.02,35.306 36.02,43.932 36.118,43.932 37.259,45.072 37.693,45.072 37.833,45.212 39.37,45.212
ECSPI2_SS0: J3.55 U1.AJ22 | length 24.5
  Top Layer w0.076: U1.AJ22@27.964,26.52 27.964,27.507 35.763,35.306 35.763,44.039 35.807,44.084 36.055,44.084 37.195,45.225 37.63,45.225 37.77,45.364 38.989,45.364
eMMC_VDDIM: C96.2 C97.1 PTP14.1 U3.C2
ENET2_MDC: J3.99 U1.AH28 | length 24.3
  Top Layer w0.076: U1.AH28@24.964,26.02 24.707,26.278 24.707,27.606 32.506,35.405 32.506,44.526 32.125,44.907 30.201,44.907
ENET2_MDIO: J3.100 U1.AH29 | length 33.2
  Top Layer w0.076: U1.AH29@24.464,26.02 24.221,26.264 24.221,27.551 32.02,35.35 32.02,44.526 28.016,44.526 27.838,44.704 27.838,48.92 28.372,49.454 30.054,49.454 30.099,49.409 30.099,49.022
ENET2_RD0: J3.82 U1.AG29 | length 1
  Top Layer w0.076: 23.478,25.52 U1.AG29@24.464,25.52
ENET2_RD1: J3.84 U1.AG28 | length 1.6
  Top Layer w0.076: 23.489,25.263 24.707,25.263 U1.AG28@24.964,25.52
ENET2_RD2: J3.86 U1.AF29 | length 1
  Top Layer w0.076: 23.478,25.02 U1.AF29@24.464,25.02
ENET2_RD3: J3.88 U1.AF28 | length 1.6
  Top Layer w0.076: 23.478,24.777 24.721,24.777 U1.AF28@24.964,25.02
ENET2_RX_CTL: J3.72 U1.AE28 | length 1.6
  Top Layer w0.076: 23.489,24.263 24.707,24.263 U1.AE28@24.964,24.52
ENET2_RXC: J3.74 U1.AE29 | length 1
  Top Layer w0.076: 23.478,24.52 U1.AE29@24.464,24.52
ENET2_TD0: J5.85 U1.AC25 | length 0.4
  Top Layer w0.076: v1@26.464,23.107 U1.AC25@26.464,23.52
  other v1: 26.461,23.105
ENET2_TD1: J3.37 U1.AE26 | length 0.3
  Top Layer w0.076: U1.AE26@25.963,24.522 U1.AE26@25.964,24.52 25.964,24.218 v1(25.965,24.217)
ENET2_TD2: J3.66 U1.AF26 | length 0.3
  Top Layer w0.076: U1.AF26@25.963,25.019 U1.AF26@25.964,25.02 v1(26.267,25.022) v1(26.267,25.022)
ENET2_TD3: J3.68 U1.AD24 | length 0.3
  Top Layer w0.076: v1@26.751,23.808 U1.AD24@26.964,24.02
  other v1: 26.725,23.808
ENET2_TX_CTL: J5.98 U1.AF24 | length 0.3
  Top Layer w0.076: v1@26.751,24.808 U1.AF24@26.964,25.02
  other v1: 26.725,24.808
ENET2_TXC: J5.93 U1.AE24 | length 0.3
  Top Layer w0.076: v1@26.751,24.308 U1.AE24@26.964,24.52
  other v1: 26.725,24.308
GND: C1.1 C2.2 C3.2 C4.2 C5.1 C6.1 C7.1 C8.1 C9.1 C10.1 C11.1 C12.1 C13.1 C14.1 C15.1 C16.1 C17.1 C18.1 C19.1 C20.1 C21.1 C22.1 C23.1 C24.1 C25.1 C26.1 C27.1 C28.1 C29.1 C30.1 C31.1 C32.1 C33.1 C34.1 C35.1 C36.1 C37.1 C38.1 C39.1 C40.1 C41.1 C42.1 C43.1 C44.1 C45.1 C46.1 C47.1 C48.1 C49.1 C50.1 C51.1 C52.1 C53.1 C54.1 C55.1 C56.1 C57.1 C58.1 C59.1 C60.1 C61.2 C62.2 C63.2 C64.2 C65.2 C66.2 C67.2 C68.2 C69.2 C70.2 C71.2 C72.2 C73.2 C74.2 C75.2 C76.2 C77.2 C78.2 C79.2 C80.2 C81.2 C82.2 C87.1 C88.1 C89.1 C90.1 C91.2 C92.1 C93.1 C94.1 C95.1 C96.1 C97.2 C98.1 C99.2 C100.2 C101.1 C102.2 C103.2 C104.1 C105.1 C106.2 C107.2 C108.1 C109.1 C110.2 C111.2 C112.1 C113.1 C114.1 C115.1 C116.2 C117.1 C118.1 C119.1 C120.1 C121.2 C122.1 C123.2 C124.1 C125.1 C126.1 C127.1 C128.1 C129.2 C130.2 C131.2 C132.1 C133.1 C134.1 C135.1 C136.1 C137.1 C138.1 C139.1 C140.1 C141.1 C142.1 J2.1 J3.9 J3.10 J3.16 J3.19 J3.20 J3.29 J3.30 J3.39 J3.40 J3.45 J3.50 J3.51 J3.54 J3.57 J3.60 J3.63 J3.69 J3.70 J3.75 J3.80 J3.81 J3.87 J3.89 J3.90 J4.7 J4.8 J4.10 J4.14 J4.17 J4.24 J4.27 J4.33 J4.34 J4.39 J4.40 J4.45 J4.46 J4.51 J4.52 J4.57 J4.58 J4.63 J4.69 J4.70 J4.75 J4.76 J4.81 J4.82 J4.87 J4.88 J4.93 J4.94 J4.99 J4.100 J5.13 J5.14 J5.15 J5.16 J5.17 J5.18 J5.19 J5.20 J5.21 J5.22 J5.23 J5.24 J5.25 J5.26 J5.27 J5.28 J5.49 J5.50 J5.59 J5.60 J5.69 J5.70 J5.79 J5.80 J5.89 J5.90 J5.99 J5.100 J6.1 J6.2 J6.7 J6.8 J6.13 J6.14 J6.19 J6.20 J6.25 J6.26 J6.31 J6.32 J6.37 J6.40 J6.43 J6.49 J6.50 J6.55 J6.60 J6.61 J6.63 J6.65 J6.67 J6.69 J6.70 J6.79 J6.80 J6.84 J6.88 J6.89 J6.92 J6.96 J6.99 J6.100 R4.2 R5.2 R8.1 R9.1 R10.1 R11.1 R12.1 R14.1 R18.1 R19.1 R21.2 U1.A1 U1.A29 U1.AA3 U1.AA7 U1.AA23 U1.AA27 U1.AB8 U1.AB10 U1.AB12 U1.AB14 U1.AB16 U1.AB18 U1.AB20 U1.AB22 U1.AC3 U1.AC6 U1.AC24 U1.AC27 U1.AE3 U1.AE27 U1.AG4 U1.AG6 U1.AG8 U1.AG10 U1.AG12 U1.AG14 U1.AG16 U1.AG18 U1.AG20 U1.AG22 U1.AG24 U1.AG26 U1.AJ1 U1.AJ29 U1.C4 U1.C6 U1.C8 U1.C10 U1.C12 U1.C14 U1.C16 U1.C18 U1.C20 U1.C22 U1.C24 U1.C26 U1.E3 U1.E27 U1.G3 U1.G6 U1.G24 U1.G27 U1.H8 U1.H10 U1.H12 U1.H14 U1.H16 U1.H18 U1.H20 U1.H22 U1.J3 U1.J7 U1.J23 U1.J27 U1.L3 U1.L7 U1.L14 U1.L16 U1.L23 U1.L27 U1.M11 U1.M19 U1.N3 U1.N7 U1.N11 U1.N19 U1.N23 U1.N27 U1.P11 U1.P19 U1.R3 U1.R7 U1.R11 U1.R12 U1.R13 U1.R14 U1.R16 U1.R17 U1.R18 U1.R19 U1.R23 U1.R27 U1.T11 U1.T19 U1.U3 U1.U7 U1.U11 U1.U18 U1.U19 U1.U23 U1.U27 U1.V11 U1.V19 U1.W3 U1.W7 U1.W14 U1.W16 U1.W23 U1.W27 U2.A3 U2.A10 U2.AB3 U2.AB5 U2.AB8 U2.AB10 U2.C1 U2.C5 U2.C8 U2.C12 U2.D2 U2.D4 U2.D9 U2.D11 U2.E1 U2.E5 U2.E8 U2.E12 U2.G1 U2.G3 U2.G5 U2.G8 U2.G10 U2.G12 U2.J1 U2.J3 U2.J10 U2.J12 U2.K2 U2.K4 U2.K9 U2.K11 U2.N2 U2.N4 U2.N9 U2.N11 U2.P1 U2.P3 U2.P10 U2.P12 U2.T1 U2.T3 U2.T5 U2.T8 U2.T10 U2.T12 U2.V1 U2.V5 U2.V8 U2.V12 U2.W2 U2.W4 U2.W9 U2.W11 U2.Y1 U2.Y5 U2.Y8 U2.Y12 U3.A6 U3.C4 U3.E7 U3.G5 U3.H10 U3.J5 U3.K8 U3.N2 U3.N5 U3.P4 U3.P6 U4.4 U4.9 U5.5 U5.30 U5.43 U5.57 Y1.2 Y1.4 | length 137.3
  Top Layer w0.076: 24.464,11.534 U1.A29@24.464,12.52 ; U1.AJ29@24.464,26.52 24.464,27.579 32.263,35.378 32.263,44.526 ; U1.A1@38.464,12.52 38.464,7.037 38.922,6.579 49.183,6.579 49.324,6.72 49.324,12.823 ; U1.AJ1@38.464,26.52 39.45,26.52
  Top Layer w0.089: U1.AB20@28.964,23.02 U1.AB18@29.964,23.02 U1.AB16@30.964,23.02 U1.AB14@31.964,23.02
  Top Layer w0.203: U1.E27@25.464,14.52 U1.G27@25.464,15.52 U1.J27@25.464,16.52 U1.L27@25.464,17.52 U1.N27@25.464,18.52 U1.R27@25.464,19.52 U1.U27@25.464,20.52 U1.W27@25.464,21.52 U1.AA27@25.464,22.52 U1.AC27@25.464,23.52 U1.AE27@25.464,24.52 25.464,25.2 25.775,25.511 25.955,25.511 U1.AG26@25.964,25.52 U1.AG24@26.964,25.52 U1.AG22@27.964,25.52 U1.AG20@28.964,25.52 U1.AG18@29.964,25.52 U1.AG16@30.964,25.52 U1.AG14@31.964,25.52 U1.AG12@32.964,25.52 U1.AG10@33.964,25.52 U1.AG8@34.964,25.52 U1.AG6@35.964,25.52 U1.AG4@36.964,25.52 37.144,25.52 37.445,25.219 37.445,13.821 37.153,13.529 36.973,13.529 U1.C4@36.964,13.52 U1.C6@35.964,13.52 U1.C8@34.964,13.52 U1.C10@33.964,13.52 U1.C12@32.964,13.52 U1.C14@31.964,13.52 U1.C16@30.964,13.52 U1.C18@29.964,13.52 U1.C20@28.964,13.52 U1.C22@27.964,13.52 U1.C24@26.964,13.52 U1.C26@25.964,13.52 ; U1.G24@26.964,15.52 27.624,16.181 ; U1.AC24@26.964,23.52 27.624,22.86 ; U1.AB20@28.964,23.02 U1.AB22@27.964,23.02 27.955,23.011 27.775,23.011 27.624,22.86 ; U1.M19@29.464,18.02 U1.N19@29.464,18.52 U1.P19@29.464,19.02 U1.R19@29.464,19.52 ; U1.V19@29.464,21.02 U1.U19@29.464,20.52 ; U1.U18@29.964,20.52 U1.U19@29.464,20.52 ; U1.L16@30.964,17.52 U1.L14@31.964,17.52 ; U1.W16@30.964,21.52 U1.W14@31.964,21.52 ; U1.AB14@31.964,23.02 U1.AB12@32.964,23.02 U1.AB10@33.964,23.02 U1.AB8@34.964,23.02 35.144,23.02 35.299,22.865 ; U1.M11@33.464,18.02 U1.N11@33.464,18.52 U1.P11@33.464,19.02 U1.R11@33.464,19.52 ; U1.V11@33.464,21.02 U1.U11@33.464,20.52 U1.T11@33.464,20.02 U1.R11@33.464,19.52 ; U1.G6@35.964,15.52 35.304,16.181 ; U1.AC6@35.964,23.52 35.308,22.865 35.299,22.865 ; 27.624,16.181 27.464,16.341 U1.J23@27.464,16.52 U1.L23@27.464,17.52 U1.N23@27.464,18.52 U1.R23@27.464,19.52 U1.U23@27.464,20.52 U1.W23@27.464,21.52 U1.AA23@27.464,22.52 27.473,22.529 27.473,22.709 27.624,22.86 ; 27.624,16.181 27.784,16.02 U1.H22@27.964,16.02 U1.H20@28.964,16.02 U1.H18@29.964,16.02 U1.H16@30.964,16.02 U1.H14@31.964,16.02 U1.H12@32.964,16.02 U1.H10@33.964,16.02 U1.H8@34.964,16.02 34.973,16.029 35.153,16.029 35.304,16.181 ; U1.R19@29.464,19.52 U1.R18@29.964,19.52 U1.R17@30.464,19.52 U1.R16@30.964,19.52 U1.R14@31.964,19.52 U1.R13@32.464,19.52 U1.R12@32.964,19.52 U1.R11@33.464,19.52 ; U1.R19@29.464,19.52 U1.T19@29.464,20.02 U1.U19@29.464,20.52 ; 35.299,22.865 35.455,22.709 35.455,22.529 U1.AA7@35.464,22.52 U1.W7@35.464,21.52 U1.U7@35.464,20.52 U1.R7@35.464,19.52 U1.N7@35.464,18.52 U1.L7@35.464,17.52 U1.J7@35.464,16.52 35.455,16.511 35.455,16.332 35.304,16.181
GPIO1_IO00: J4.21 U1.A7 | length 15.1
  Top Layer w0.076: U1.A7@35.464,12.52 35.464,7.31 38.049,4.724 44.272,4.724
GPIO1_IO01: J4.23 U1.E8 | length 0.4
  Top Layer w0.076: v1@34.551,14.52 U1.E8@34.964,14.52
  other v1: 34.548,14.523
GPIO1_IO05: J4.19 U1.B4 | length 30.1
  Top Layer w0.076: U1.B4@36.964,13.02 37.207,12.777 37.207,7.134 38.564,5.777 50.406,5.777 51.128,5.055 51.128,0.807 50.714,0.394 46.228,0.394
GPIO1_IO06: J4.25 U1.A3 | length 30.9
  Top Layer w0.076: U1.A3@37.464,12.52 37.464,7.113 38.648,5.929 50.469,5.929 51.28,5.118 51.28,0.734 51.27,0.734 50.777,0.241 45.06,0.241
GPIO1_IO07: J4.32 U1.F6 | length 0.4
  Top Layer w0.076: U1.F6@35.964,15.02 U1.F6@35.964,15.02 v1@36.377,15.022
  other v1: 36.38,15.019
GPIO1_IO08: J4.30 U1.A8 | length 15.6
  Top Layer w0.076: U1.A8@34.964,12.52 34.964,7.175 37.846,4.293 44.044,4.293
GPIO1_IO09: J4.28 U1.B8 | length 16
  Top Layer w0.076: U1.B8@34.964,13.02 35.207,12.777 35.207,7.236 37.922,4.521 44.221,4.521
GPIO1_IO10: J4.26 U1.B7 | length 16
  Top Layer w0.076: U1.B7@35.456,13.02 35.713,12.763 35.713,7.405 38.216,4.902 44.99,4.902
GPIO1_IO11: J4.22 U1.D8 | length 0.4
  Top Layer w0.076: v1@34.551,14.02 U1.D8@34.964,14.02
  other v1: 34.548,14.023
GPIO1_IO12: J4.11 U1.A5 | length 27.2
  Top Layer w0.076: U1.A5@36.464,12.52 36.464,7.151 38.357,5.258 50.278,5.258 50.67,4.866 50.67,1.129 50.392,0.851 47.803,0.851
GPIO1_IO13: J4.18 U1.A6 | length 16.7
  Top Layer w0.076: U1.A6@35.956,12.52 35.956,7.417 38.319,5.055 46.584,5.055
GPIO1_IO14: J4.15 U1.A4 | length 28.5
  Top Layer w0.076: U1.A4@36.964,12.52 36.964,7.148 38.488,5.624 50.343,5.624 50.975,4.992 50.975,0.941 50.581,0.546 46.99,0.546
GPIO1_IO15: J4.13 U1.B5 | length 28.4
  Top Layer w0.076: U1.B5@36.464,13.02 36.721,12.763 36.721,7.149 38.434,5.436 50.316,5.436 50.823,4.929 50.823,1.066 50.455,0.699 47.422,0.699
HDMI_CEC: J3.49 U1.AD22 | length 0.4
  Top Layer w0.076: v1@27.551,24.02 U1.AD22@27.964,24.02
  other v1: 27.548,24.023
HDMI_DDC_SCL: J3.41 U1.AC22 | length 0.4
  Top Layer w0.076: v1@27.551,23.52 U1.AC22@27.964,23.52
  other v1: 27.548,23.523
HDMI_DDC_SDA: J3.43 U1.AF22 | length 0.4
  Top Layer w0.076: v1@27.551,25.02 U1.AF22@27.964,25.02
  other v1: 27.548,25.023
HDMI_HPD: J3.47 U1.AE22 | length 0.4
  Top Layer w0.076: v1@27.551,24.52 U1.AE22@27.964,24.52
  other v1: 27.548,24.523
HDMI_TX0_N: J3.71 U1.AJ25 | length 23
  Top Layer w0.076: U1.AJ25@26.472,26.52 26.472,27.507
  Top Layer w0.094: 26.472,27.507 34.239,35.274 34.239,44.574 34.241,44.574 34.387,44.721 34.733,44.721 35.083,45.07 35.652,45.07 35.702,45.121
HDMI_TX0_P: J3.73 U1.AH25 | length 23.5
  Top Layer w0.076: 26.218,27.505 26.218,26.274 U1.AH25@26.472,26.02
  Top Layer w0.094: 26.218,27.505 26.218,27.566 34.017,35.364 34.017,44.665 34.295,44.943 34.643,44.943 34.991,45.291 35.281,45.291
HDMI_TX1_N: J3.77 U1.AJ26 | length 22.4
  Top Layer w0.076: U1.AJ26@25.964,26.52 25.964,27.507
  Top Layer w0.094: 25.964,27.507 25.964,27.553 33.763,35.351 33.763,44.652 34.366,45.255 34.519,45.255
HDMI_TX1_P: J3.79 U1.AH26 | length 22.7
  Top Layer w0.076: 25.707,27.496 25.707,26.278 U1.AH26@25.964,26.02
  Top Layer w0.094: 25.707,27.496 25.707,27.608 33.506,35.407 33.506,44.708 33.972,45.174
HDMI_TX2_N: J3.83 U1.AJ27 | length 21.7
  Top Layer w0.076: U1.AJ27@25.464,26.52 25.464,27.507
  Top Layer w0.094: 25.464,27.507 25.464,27.607 33.263,35.405 33.263,44.871 33.35,44.958
HDMI_TX2_P: J3.85 U1.AH27 | length 22.3
  Top Layer w0.076: 25.221,27.507 25.221,26.264 U1.AH27@25.464,26.02
  Top Layer w0.094: 25.221,27.507 25.221,27.676 33.02,35.475 33.02,44.958
HDMI_TXC_N: J3.65 U1.AJ24 | length 23.3
  Top Layer w0.076: U1.AJ24@26.964,26.52 26.953,26.532 26.953,26.915 26.964,26.927 26.964,27.445 26.996,27.477
  Top Layer w0.094: 26.996,27.477 34.836,35.317 34.836,44.269 35.245,44.679 35.99,44.679 36.677,45.365
HDMI_TXC_P: J3.67 U1.AH24 | length 23.8
  Top Layer w0.076: 26.715,27.496 26.715,27.03 26.703,27.018 26.703,26.303 26.972,26.035 U1.AH24@26.972,26.02
  Top Layer w0.094: 26.715,27.496 26.715,27.509 34.615,35.409 34.615,44.361 35.103,44.849 35.692,44.849 35.743,44.9 35.898,44.9 36.33,45.331
I2C1_SCL: J6.46 R34.1 U1.AC8 U5.41 | length 0.4
  Top Layer w0.076: v1@34.551,23.52 U1.AC8@34.964,23.52
  other v1: 34.548,23.523
I2C1_SDA: J3.28 R33.1 U1.AH7 U5.42 | length 21.8
  Top Layer w0.076: U1.AH7@35.464,26.02 35.221,26.264 35.221,27.507 43.02,35.306 43.02,44.526
I2C2_SCL: J3.24 R36.1 U1.AH6 | length 21.8
  Top Layer w0.076: U1.AH6@35.964,26.02 35.707,26.278 35.707,27.496 43.506,35.294 43.506,44.526
I2C2_SDA: J5.57 R35.1 U1.AE8 | length 0.4
  Top Layer w0.076: v1@34.551,24.52 U1.AE8@34.964,24.52
  other v1: 34.548,24.523
I2C3_SCL: J3.26 R38.1 U1.AJ7 | length 21.2
  Top Layer w0.076: U1.AJ7@35.464,26.52 35.464,27.507 43.263,35.306 43.263,44.526
I2C3_SDA: J3.22 R37.1 U1.AJ6 | length 21.2
  Top Layer w0.076: U1.AJ6@35.964,26.52 35.964,27.507 43.763,35.306 43.763,44.526
I2C4_SCL: J5.65 R40.1 U1.AF8 | length 0.4
  Top Layer w0.076: v1@34.551,25.02 U1.AF8@34.964,25.02
  other v1: 34.548,25.023
I2C4_SDA: J5.67 R39.1 U1.AD8 | length 0.4
  Top Layer w0.076: v1@34.551,24.02 U1.AD8@34.964,24.02
  other v1: 34.548,24.023
I2C5_SCL: J5.88 R42.1 U1.AE18 | length 0.4
  Top Layer w0.076: v1@29.551,24.52 U1.AE18@29.964,24.52
  other v1: 29.548,24.523
I2C5_SDA: J5.76 R41.1 U1.AC18 | length 0.4
  Top Layer w0.076: v1@29.551,23.52 U1.AC18@29.964,23.52
  other v1: 29.548,23.523
I2C6_SCL: J3.2 R43.1 U1.AC14 | length 0.4
  Top Layer w0.076: v1@31.551,23.52 U1.AC14@31.964,23.52
  other v1: 31.548,23.523
I2C6_SDA: J3.4 R44.1 U1.AD14 | length 0.4
  Top Layer w0.076: v1@31.551,24.02 U1.AD14@31.964,24.02
  other v1: 31.548,24.023
JTAG_TCK: J4.68 R5.1 U1.G18 | length 0.4
  Top Layer w0.076: U1.G18@29.964,15.52 v1@30.377,15.52
  other v1: 30.38,15.518
JTAG_TDI: J4.64 U1.G16 | length 0.4
  Top Layer w0.076: U1.G16@30.964,15.52 v1@31.377,15.52
  other v1: 31.38,15.518
JTAG_TDO: J4.62 U1.F14 | length 0.4
  Top Layer w0.076: U1.F14@31.964,15.02 v1@32.377,15.02
  other v1: 32.38,15.018
JTAG_TMS: J4.60 U1.G14 | length 0.4
  Top Layer w0.076: U1.G14@31.964,15.52 v1@32.377,15.52
  other v1: 32.38,15.518
LVDS0_CLK_N: J6.47 U1.G28 | length 1.6
  Top Layer w0.076: 23.478,15.277 24.721,15.277 U1.G28@24.964,15.52
LVDS0_CLK_P: J6.45 U1.F29 | length 1
  Top Layer w0.076: 23.478,15.02 U1.F29@24.464,15.02
LVDS0_TX0_N: J6.35 U1.E28 | length 1.6
  Top Layer w0.076: 23.478,14.277 24.721,14.277 U1.E28@24.964,14.52
LVDS0_TX0_P: J6.33 U1.D29 | length 0.9
  Top Layer w0.076: 23.528,14.022 23.53,14.02 U1.D29@24.464,14.02
LVDS0_TX1_N: J6.41 U1.F28 | length 1.6
  Top Layer w0.076: 23.489,14.763 24.707,14.763 U1.F28@24.964,15.02
LVDS0_TX1_P: J6.39 U1.E29 | length 1
  Top Layer w0.076: 23.478,14.52 U1.E29@24.464,14.52
LVDS0_TX2_N: J6.53 U1.H28 | length 1.6
  Top Layer w0.076: 23.489,15.763 24.707,15.763 U1.H28@24.964,16.02
LVDS0_TX2_P: J6.51 U1.G29 | length 1
  Top Layer w0.076: 23.478,15.52 U1.G29@24.464,15.52
LVDS0_TX3_N: J6.59 U1.J28 | length 1.6
  Top Layer w0.076: 23.478,16.277 24.721,16.277 U1.J28@24.964,16.52
LVDS0_TX3_P: J6.57 U1.H29 | length 1
  Top Layer w0.076: 23.478,16.02 U1.H29@24.464,16.02
LVDS1_CLK_N: J6.17 U1.B28 | length 3.2
  Top Layer w0.076: 23.478,13.285 24.721,13.285 24.964,13.528 ; U1.B28@24.964,13.02 25.221,12.763 25.221,11.545
LVDS1_CLK_P: J6.15 U1.A28 | length 1
  Top Layer w0.076: 24.964,11.534 U1.A28@24.964,12.52
LVDS1_TX0_N: J6.5 U1.B26 | length 1.6
  Top Layer w0.076: U1.B26@25.964,13.02 26.221,12.763 26.221,11.545
LVDS1_TX0_P: J6.3 U1.A26 | length 1
  Top Layer w0.076: 25.964,11.534 U1.A26@25.964,12.52
LVDS1_TX1_N: J6.11 U1.B27 | length 1.6
  Top Layer w0.076: U1.B27@25.464,13.02 25.707,12.777 25.707,11.534
LVDS1_TX1_P: J6.9 U1.A27 | length 1
  Top Layer w0.076: 25.464,11.534 U1.A27@25.464,12.52
LVDS1_TX2_N: J6.23 U1.C28 | length 1.6
  Top Layer w0.076: 23.489,13.771 24.707,13.771 24.964,14.028
LVDS1_TX2_P: J6.21 U1.B29 | length 2
  Top Layer w0.076: 23.478,13.02 U1.B29@24.464,13.02 ; 23.478,13.528 24.464,13.528
LVDS1_TX3_N: J6.29 U1.D28
LVDS1_TX3_P: J6.27 U1.C29
NetC83_2: C83.2 U1.A10 | length 6.1
  Top Layer w0.076: 33.964,6.452 U1.A10@33.964,12.52
NetC84_1: C84.1 U1.B13 | length 6.7
  Top Layer w0.076: U1.B13@32.456,13.02 32.723,12.753 32.723,6.452
NetC85_1: C85.1 U1.A13 | length 20.7